# Altium PCB 35662.0.PcbDoc
Units mil, origin at the board's own origin, x right, y up, seen from the top; angles counter-clockwise.
Board outline 2775.68 x 1781.68 mil, 2 copper layers (Top Layer, Bottom Layer); 58 components, 65 nets, 383 pads, 116 vias.
Unrouted connection lines stored in the file: 120.
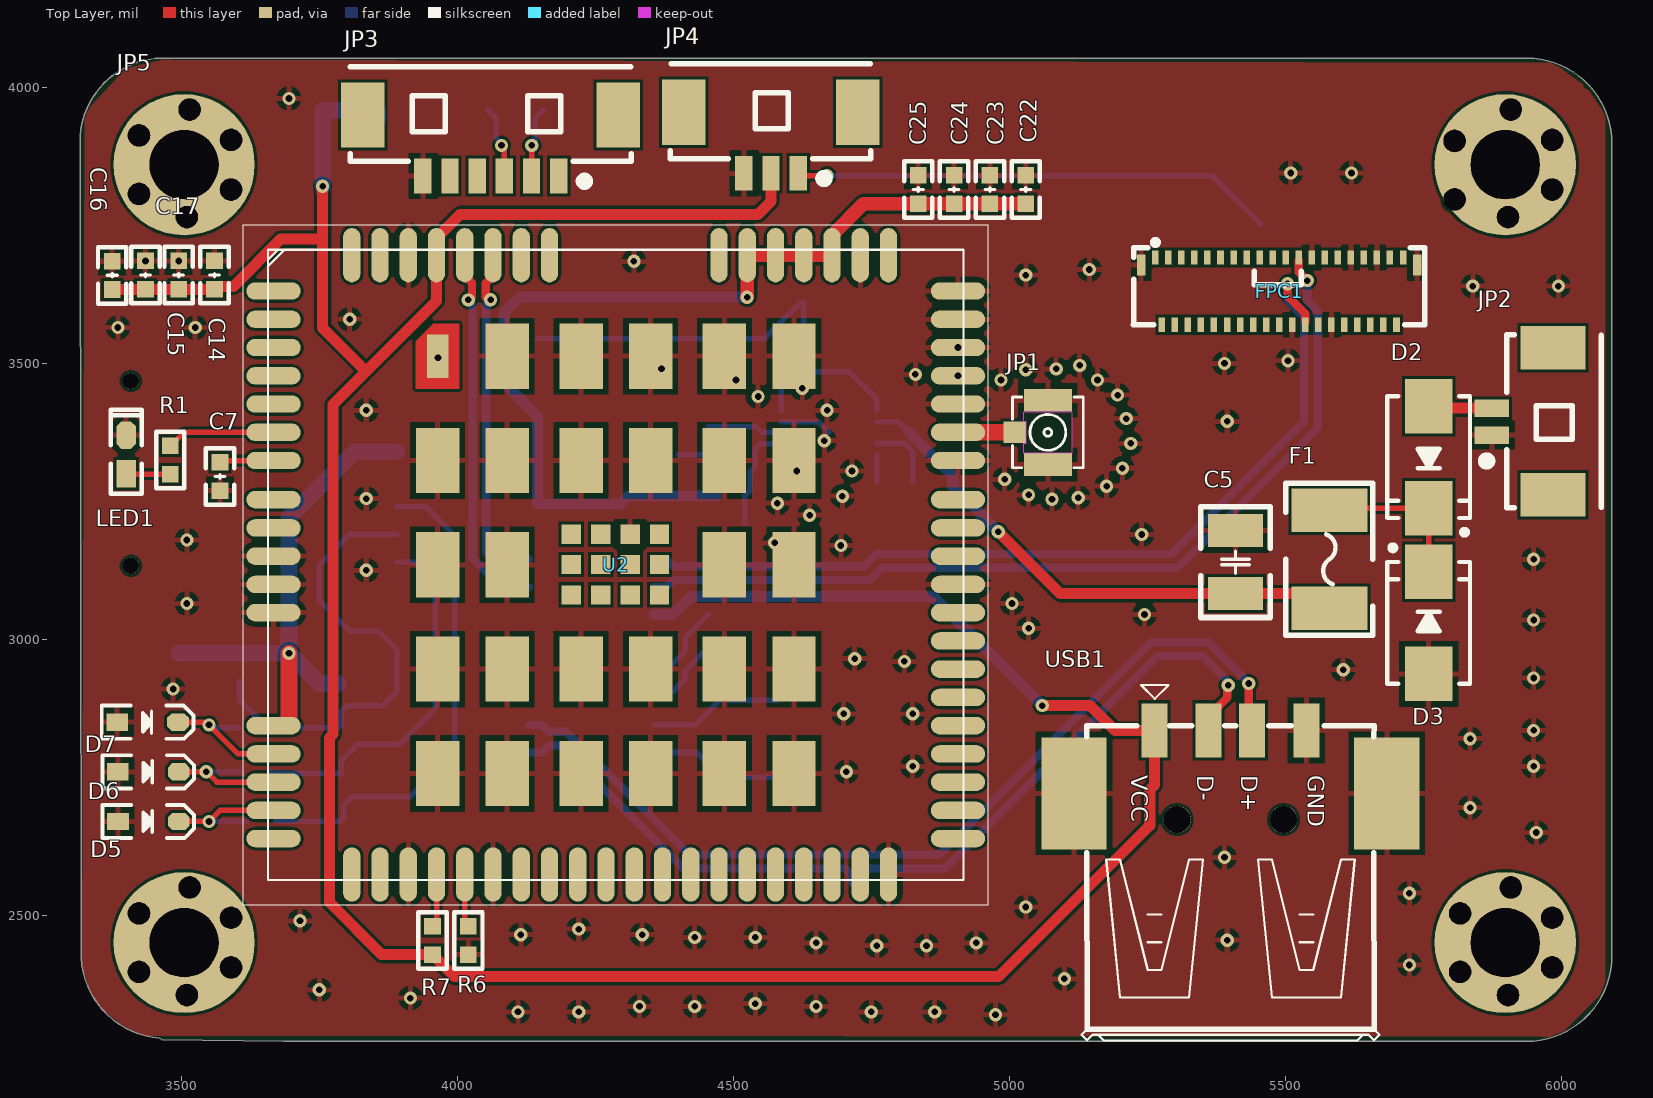
[diagram p0: Top Layer view]
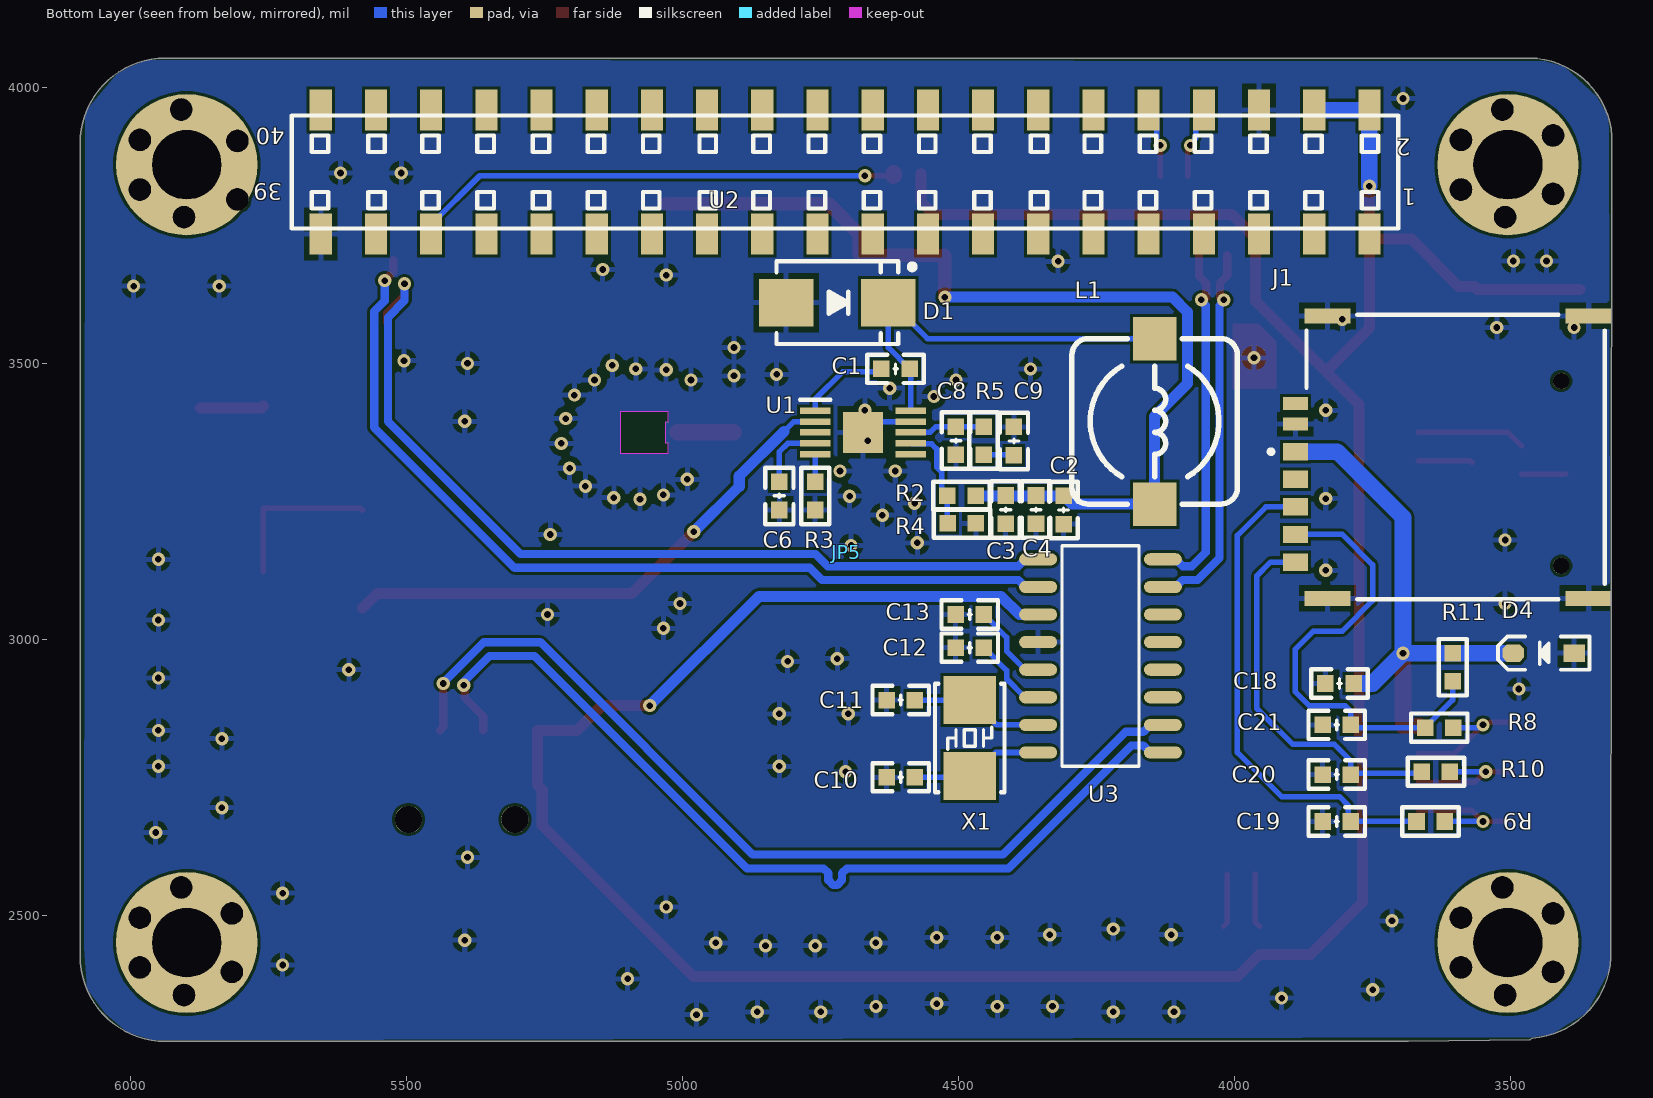
[diagram p1: Bottom Layer view, seen from below]

## Layer stack, top to bottom
Top Solder: solder mask 0.4, Solder Resist, Dk 3.5
Top Layer: signal copper 1.4
Dielectric 1: dielectric 12.6, FR-4, Dk 4.8
Bottom Layer: signal copper 1.4
Bottom Solder: solder mask 0.4, Solder Resist, Dk 3.5

## Board outline
3318.24,2422.72 ccw(c3472.99,2431.73) 3460.84,2277.19 3464.92,2274.99 3685.35,2271.6 3685.43,2271.6 5937.01,2271.6 ccw(c5937.01,2426.61) 6092.02,2426.61 6092.02,2467.25 6092.06,2467.87 6092.06,3855.36 6092.02,3855.98 6092.02,3898.27 ccw(c5937.01,3898.27) 5937.01,4053.28 3465,4053.28 3464.89,4053.28 ccw(c3468.2,3901.47) 3316.39,3898.21

## Design rules (kind name [scope] priority, off if disabled: settings)
Clearance [All] p1: gap=5 ignorepadtopadclearanceinfootprint=TRUE
DiffPairsRouting [All] p1: maxlimit=10 minlimit=10 mostfreqgap=10 toplayer_minwidth=15 toplayer_maxwidth=15 toplayer_prefwidth=15 bottomlayer_minwidth=15 bottomlayer_maxwidth=15 bottomlayer_prefwidth=15 maxuncoupledlength=500
HoleSize [All] p1: absolutevalues=TRUE maxlimit=300 minlimit=1 maxpercent=80.000 minpercent=20.000
MinimumSolderMaskSliver [All] p1: minsoldermaskwidth=0
PolygonConnect [All] p1: connectstyle=Relief reliefconductorwidth=10 reliefentries=4 polygonreliefangle="90 Angle" airgapwidth=10
RoutingVias [All] p1: holewidth=28 width=50 viastyle="Through Hole" minholewidth=28 minwidth=50 maxholewidth=28 maxwidth=50
SilkToSilkClearance [All] p1: silktosilkclearance=0
SilkToSolderMaskClearance [IsPad] p1: minsilkscreentomaskgap=0 clearancetoexposedcopper=TRUE
SolderMaskExpansion [All] p1: expansion=4 istentingtop=FALSE
SupplyNets "Schematic Supply Nets" [InNet('VBAT_IN')] p1: voltage=0.000
SupplyNets "Schematic Supply Nets_3" [InNet('VCC_EC20')] p2: voltage=0.000
SupplyNets "Schematic Supply Nets_4" [InNet('GND')] p3: voltage=0.000
SupplyNets "Schematic Supply Nets_2" [InNet('VCC_5V')] p4: voltage=0.000
Width [All] p1: maxlimit=50 minlimit=6 preferedwidth=10
25 further rules are at their usual default settings.

## Classes and differential pairs
differential pair USB3_HOST1: +USB3_HOST1_P -USB3_HOST1_N
differential pair D4: +D4_P -D4_N
differential pair D1: +D1_P -D1_N

## Components (designator, comment, footprint, x,y, rotation, side; value= is the part's Value field where it differs from the comment)
C1 "100nF" "C 0603_L" 4614.41,3490 r180 bottom
C2 "47uF" "C 0603_L" 4310,3234.41 r270 bottom
C3 "47uF" "C 0603_L" 4415,3235 r270 bottom
C4 "47uF" "C 0603_L" 4360,3235 r270 bottom
C5 "22uF X7R 25V" "C 1210_L" 5410,3140 r90 top
C6 "100nF" "C 0603_L" 4825,3260 r270 bottom
C7 "47uF" "C 0603_L" 3570,3295 r270 top
C8 "15pF" "C 0603_L" 4505,3360 r270 bottom
C9 "3.3nF" "C 0603_L" 4400,3359.41 r90 bottom
C10 "12pF" "C 0603_L" 4605,2750 r0 bottom
C11 "12pF" "C 0603_L" 4605,2890 r0 bottom
C12 "10uF" "C 0603_L" 4480,2985 r0 bottom
C13 "10uF" "C 0603_L" 4480,3045 r0 bottom
C14 "10uF" "C 0603_L" 3560,3660 r90 top
C15 "10uF" "C 0603_L" 3495,3660 r90 top
C16 "10uF" "C 0603_L" 3374.59,3659.46 r90 top
C17 "10uF" "C 0603_L" 3435,3660 r90 top
C18 "100nF" "C 0603_L" 3810,2920 r0 bottom
C19 "33pF" "C 0603_L" 3815,2670 r0 bottom
C20 "33pF" "C 0603_L" 3815,2755 r0 bottom
C21 "33pF" "C 0603_L" 3815,2845 r0 bottom
C22 "47uF" "C 0603_L" 5030,3815 r270 top
C23 "47uF" "C 0603_L" 4965,3815 r270 top
C24 "0.1uF" "C 0603_L" 4900,3815 r270 top
C25 "0.1uF" "C 0603_L" 4835,3815 r270 top
D1 "SS24" SMB 4720,3610 r180 bottom
D2 "B360B" SMB 5760,3330 r270 top
D3 "SMBJ18CA" smb 5760,3030 r90 top
D4 "GBLC05CI" SOD-323 3440,2975 r0 bottom
D5 "GBLC05CI" SOD-323 3440.12,2670 r0 top
D6 "GBLC05CI" SOD-323 3440,2760 r0 top
D7 "BLC05CI" SOD-323 3438.82,2850 r0 top
F1 "SMD1812P260TF/12 12V 2.6A" "FU 1812" 5580,3145 r90 top
FPC1 "AFE03-S39FMA-1H" FPC-SMD_P0.30-39P_FGS-XJ-H1.0 5779.05,3550.98 r180 top
J1 "SIM8066-6-1-14-01-A_REVA" "NANO SIM" 3969.84,3660.16 r270 bottom locked
JP1 "SMA WIFI 天线接口" COAXIAL/SMD/CON/V/I-PEX/W08-5801 5070,3375 r270 top
JP2 "HDR-1X2" MX1.25-WT-2P 5985,3395 r90 top
JP3 "HDR-1X6" MX1.25-WT-6P 4060,3950 r180 top
JP4 "HDR-1X3" MX1.25-WT-3P 4567.76,3955 r180 top
JP5 "Header 2X11" gudingkong 2918.7,2055 r0 top locked
L1 "10uH" CDRH73 4145,3395 r270 bottom
LED1 "蓝色" "LED 0603B" 3400.26,3335 r90 top
R1 "1K" "R 0603_L" 3480,3325 r90 top
R2 "30K" "R 0603_L" 4495,3260 r0 bottom
R3 "237K" "R 0603_L" 4760,3260 r270 bottom
R4 "10K" "R 0603_L" 4494.41,3210 r180 bottom
R5 "45.3K" "R 0603_L" 4455,3360 r270 bottom
R6 "1K" "R 0603_L" 4020,2454.41 r270 top
R7 "1K" "R 0603_L" 3955,2454.41 r270 top
R8 "51R" "R 0603_L" 3629.41,2840 r0 bottom
R9 "51R" "R 0603_L" 3635.59,2760 r0 bottom
R10 "51R" "R 0603_L" 3645,2670 r0 bottom
R11 "10K" "R 0603_L" 3605,2949.41 r90 bottom
U1 "TPS54260DGQR" SOP50P490X110-11N 4673.39,3375 r180 bottom
U2 "EC200TCNDA-N06-SNNSA" EC200U 3592.17,2510 r0 bottom locked
U3 "SL2.1A" SL2.1A 4381.3,2494.85 r90 bottom
USB1 "USB" USB-A/S_C 5400.63,2673.58 r0 top
X1 "12MHz" "OSC 5032-2P" 4480,2821.1 r90 bottom

## Footprints (in the part's own frame and the unit in brackets; to place one, negate y for a bottom-side part, rotate by r counter-clockwise, add the part's x,y. Pads: shape width x height; smd on the part's side, far side on the other; paste and mask are expansions set on the pad)
"C 0603_L" [mil] "无极性贴片电容                                       淘宝ID:黄晶宝石"
  rect 30x30 smd: 1(-25.59,0) 2(25.59,0)
  silkscreen extent -51,-26 51,26, body extent -31,-16 31,16, height 32
"C 1210_L" [mil] "无极性贴片电容                                淘宝ID:黄晶宝石"
  rect 60x100 smd: 1(-57.09,0) 2(57.09,0)
  silkscreen extent -100,-63 100,63, body extent -63,-51 63,51, height 60
CDRH73 [mm] "7.3*7.3*3.4mm（长宽高）"
  rect 2x2 smd: 1(-3.81,0) 2(3.81,0)
  silkscreen extent -3.81,-3.81 3.81,3.81, body extent -3.65,-3.65 3.65,3.65, height 3.8
COAXIAL/SMD/CON/V/I-PEX/W08-5801 [mm] "https://shop463601444.taobao.com"
  rect 1x1.05 smd: 1(0,-1.525)
  rect 1.05x2.2 smd: 2(-1.475,0) 3(1.475,0)
  Keep-Out Layer pour cut-out: -0.95,1.1 0.95,1.1 0.95,-1.1 0.5,-1.1 0.5,-1 -0.5,-1 -0.5,-1.1 -0.95,-1.1 -0.95,1.1
  silkscreen extent -1.62,-1.62 1.62,1.62
EC200U [mm] "贴片电解电容，直径6.3mm，高5.4mm"
  oval 2.5x0.8 smd far side mask+0.05: 1(1.903,-28.475) 2(1.903,-27.175) 3(1.903,-25.875) 4(1.903,-24.575) 5(1.903,-23.275) 6(1.903,-21.975) 7(1.903,-20.675) 8(1.903,-16.275) 9(1.903,-14.975) 10(1.903,-13.675) 14(1.903,-8.475) 15(1.903,-7.175) 16(1.903,-5.875) 17(1.903,-4.575) 18(1.903,-3.275) 37(33.403,-3.275) 38(33.403,-4.575) 39(33.403,-5.875) 40(33.403,-7.175) 41(33.403,-8.475) 42(33.403,-9.775) 43(33.403,-11.075) 44(33.403,-12.375) 45(33.403,-13.675) 46(33.403,-14.975) 47(33.403,-16.275) 48(33.403,-20.675) 49(33.403,-21.975) 50(33.403,-23.275) 51(33.403,-24.575) 52(33.403,-25.875) 53(33.403,-27.175) 54(33.403,-28.475) 141(1.903,-18.875) 142(1.903,-17.575) 143(33.403,-17.575) 144(33.403,-18.875)
  oval 0.8x2.5 smd far side mask+0.05: 19(8.103,-1.625) 20(9.403,-1.625) 21(10.703,-1.625) 22(12.003,-1.625) 23(13.303,-1.625) 24(14.603,-1.625) 25(15.903,-1.625) 26(17.203,-1.625) 27(18.503,-1.625) 28(19.803,-1.625) 29(21.103,-1.625) 30(22.403,-1.625) 31(23.703,-1.625) 32(25.003,-1.625) 33(26.303,-1.625) 34(27.603,-1.625) 35(28.903,-1.625) 36(30.203,-1.625) 55(30.203,-30.125) 56(28.903,-30.125) 57(27.603,-30.125) 58(26.303,-30.125) 59(25.003,-30.125) 60(23.703,-30.125) 61(22.403,-30.125) 67(14.603,-30.125) 68(13.303,-30.125) 69(12.003,-30.125) 70(10.703,-30.125) 71(9.403,-30.125) 72(8.103,-30.125) 113(6.803,-30.125) 114(5.503,-30.125) 115(6.803,-1.625) 116(5.503,-1.625)
  rect 0.889x0.889 smd far side mask+0.05: 73(19.665,-17.285) 74(19.665,-15.888) 75(19.665,-14.491) 76(18.31,-17.285) 77(18.31,-15.888) 78(18.31,-14.491) 79(16.956,-17.285) 80(16.956,-15.888) 81(16.956,-14.491) 82(15.601,-17.285) 83(15.601,-15.888) 84(15.601,-14.491)
  rect 2x3 smd far side mask+0.05: 85(25.853,-25.475) 86(25.853,-20.675) 87(25.853,-15.875) 88(25.853,-11.075) 89(25.853,-6.275) 90(22.653,-25.475) 91(22.653,-20.675) 92(22.653,-15.875) 93(22.653,-11.075) 94(22.653,-6.275) 95(19.253,-25.475) 96(19.253,-20.675) 97(19.253,-11.075) 98(19.253,-6.275) 99(16.053,-25.475) 100(16.053,-20.675) 101(16.053,-11.075) 102(16.053,-6.275) 103(12.653,-25.475) 104(12.653,-20.675) 105(12.653,-15.875) 106(12.653,-11.075) 107(12.653,-6.275) 109(9.453,-20.675) 110(9.453,-15.875) 111(9.453,-11.075) 112(9.453,-6.275)
  rect 1x2 smd far side mask+0.05: 108(9.453,-25.475)
  Bottom Layer region: 8.453,-26.175 9.253,-26.975 10.453,-26.975 10.453,-23.975 8.453,-23.975
  body extent 1.64,-30.35 33.66,-1.4, height 1
FPC-SMD_P0.30-39P_FGS-XJ-H1.0 [mm]
  rect 0.3x0.65 smd paste+0 mask+0.051: 1(13.066,-3.582) 2(12.766,-0.482) 3(12.466,-3.582) 4(12.166,-0.482) 5(11.866,-3.582) 6(11.566,-0.482) 7(11.266,-3.582) 8(10.966,-0.482) 9(10.666,-3.582) 10(10.366,-0.482) 11(10.066,-3.582) 12(9.766,-0.482) 13(9.466,-3.582) 14(9.166,-0.482) 15(8.866,-3.582) 16(8.566,-0.482) 17(8.266,-3.582) 18(7.966,-0.482) 19(7.666,-3.582) 20(7.366,-0.482) 21(7.066,-3.582) 22(6.766,-0.482) 23(6.466,-3.582) 24(6.166,-0.482) 25(5.866,-3.582) 26(5.566,-0.482) 27(5.266,-3.582) 28(4.966,-0.482) 29(4.666,-3.582) 30(4.366,-0.482) 31(4.066,-3.582) 32(3.766,-0.482) 33(3.466,-3.582) 34(3.166,-0.482) 35(2.866,-3.582) 36(2.566,-0.482) 37(2.266,-3.582) 38(1.966,-0.482) 39(1.666,-3.582)
  rect 0.4x0.95 smd paste+0 mask+0.051: 40(13.716,-3.232) 41(1.016,-3.232)
  silkscreen extent 0.67,-4.4 14.07,-0.48
"FU 1812" [mm] "贴片保险丝          淘宝ID:黄晶宝石"
  rect 2x3.5 smd: 1(-2.25,0) 2(2.25,0)
  silkscreen extent -3.5,-2 3.5,2, body extent -2.3,-1.61 2.3,1.61, height 0.87
gudingkong [mil]
  round 40 hole 40 slot 40.2 at 30 deg paste-99999 mask+4: 1(504.5,342.55) 1(504.5,1752) 1(671.3,440.55) 1(671.3,1850) 1(2888.2,1742) 1(2898.2,342.55) 1(3065,440.55) 1(3065,1850)
  round 40 hole 40 slot 40.2 at 150 deg paste-99999 mask+4: 1(504.5,448.55) 1(504.5,1858) 1(671.3,350.55) 1(671.3,1760) 1(2888.2,1848) 1(2898.2,448.55) 1(3065,350.55) 1(3065,1760)
  round 255.91 hole 125 slot 125.2 at 90 deg paste-99999 mask+4: 1(586.3,395.55) 1(586.3,1805) 1(2980,395.55) 1(2980,1805)
  round 40 hole 40 slot 40.2 at 90 deg paste-99999 mask+4: 1(591.3,300.55) 1(591.3,1710) 1(596.3,495.55) 1(596.3,1905) 1(2985,300.55) 1(2985,1710) 1(2990,495.55) 1(2990,1905)
  rect 40.16x74.8 smd far side: 1(837.16,1679.59) 2(837.16,1904) 3(937.16,1679.59) 4(937.16,1904) 5(1037.16,1679.59) 6(1037.16,1904) 7(1137.16,1679.59) 8(1137.16,1904) 9(1237.16,1679.59) 10(1237.16,1904) 11(1337.16,1679.59) 12(1337.16,1904) 13(1437.16,1679.59) 14(1437.16,1904) 15(1537.16,1679.59) 16(1537.16,1904) 17(1637.16,1679.59) 18(1637.16,1904) 19(1737.16,1679.59) 20(1737.16,1904) 21(1837.16,1679.59) 22(1837.16,1904) 23(1937.16,1679.59) 24(1937.16,1904) 25(2037.16,1679.59) 26(2037.16,1904) 27(2137.16,1679.59) 28(2137.16,1904) 29(2237.16,1679.59) 30(2237.16,1904) 31(2337.16,1679.59) 32(2337.16,1904) 33(2437.16,1679.59) 34(2437.16,1904) 35(2537.16,1679.59) 36(2537.16,1904) 37(2637.16,1679.59) 38(2637.16,1904) 39(2737.16,1679.59) 40(2737.16,1904)
  body extent 786,1666 2788,1918, height 203
"LED 0603B" [mil] "蓝色0603LED                             淘宝ID:黄晶宝石"
  rect 50x35 smd: 1(-35,0.26)
  oct 50x35 smd: 2(35,0.26)
  silkscreen extent -71,-28 81,28, body extent -31,-16 31,16, height 24
MX1.25-WT-2P [mm] "长：7.65mm，宽：4.2mm，高：3.4mm"
  rect 2x3 smd: 0(-3.382,0) 0(3.382,0)
  rect 0.8x1.6 smd: 1(-0.639,2.811) 2(0.611,2.811)
  silkscreen extent -3.98,-2.23 4,3.25, body extent -3.82,-2.1 3.83,3.09, height 3.4
MX1.25-WT-3P [mm] "长：8.9mm，宽：4.2mm，高：3.4mm"
  rect 2x3 smd: 0(-4.007,0) 0(4.007,0)
  rect 0.8x1.6 smd: 1(-1.264,2.811) 2(-0.014,2.811) 3(1.236,2.811)
  silkscreen extent -4.61,-2.23 4.62,3.25, body extent -4.45,-2.1 4.45,3.09
MX1.25-WT-6P [mm] "长：12.65mm，宽：4.2mm，高：3.4mm"
  rect 2x3 smd: 0(-5.882,0) 0(5.882,0)
  rect 0.8x1.6 smd: 1(-3.139,2.811) 2(-1.889,2.811) 3(-0.639,2.811) 4(0.611,2.811) 5(1.861,2.811) 6(3.111,2.811)
  silkscreen extent -6.48,-2.23 6.45,3.25, body extent -6.32,-2.1 6.33,3.09, height 3.4
"NANO SIM" [mm]
  rect 0.8x1.14 smd: C1(8.132,2.028) C2(10.672,2.028) C3(13.212,2.028) C6(9.402,2.028) C7(11.942,2.028)
  rect 0.6x1.14 smd: C5(6.862,2.028) CD(5.912,2.028)
  rect 0.7x2.1 smd: G1(14.882,3.508) G2(1.882,3.508) G3(14.882,15.508) G4(1.882,15.508)
  round 0.75 hole 0.75 unplated: ""(4.882,14.258) ""(13.382,14.258)
  silkscreen extent 1.84,0.81 14.93,16.26
"OSC 5032-2P" [mm] "5mm*3.2mm*0.8mm(长*宽*高)                  淘宝ID:黄晶宝石"
  rect 2.2x2.4 smd: 1(-1.75,0) 2(1.75,0)
  silkscreen extent -2.5,-1.6 2.5,1.6, body extent -2.5,-1.6 2.5,1.6, height 0.86
"R 0603_L" [mil] "1/10W贴片电阻                 淘宝ID:黄晶宝石"
  rect 30x30 smd: 1(-25.59,0) 2(25.59,0)
  silkscreen extent -51,-26 51,26, body extent -31,-16 31,16, height 16
SL2.1A [mm]
  oval 0.56x1.745 smd paste+0 mask+0.051: 1(7.624,-6.383) 2(8.894,-6.383) 3(10.164,-6.383) 4(11.434,-6.383) 5(12.704,-6.383) 6(13.974,-6.383) 7(15.244,-6.383) 8(16.514,-6.383) 9(16.514,-0.638) 10(15.244,-0.638) 11(13.974,-0.638) 12(12.704,-0.638) 13(11.434,-0.638) 14(10.164,-0.638) 15(8.894,-0.638) 16(7.624,-0.638)
  silkscreen extent 6.99,-5.28 17.15,-1.74
SMB [mm] "4.7*3.9*2.2mm(长宽高，不包括引脚）"
  rect 2.5x2.2 smd: 1(-2.35,0) 2(2.35,0)
  silkscreen extent -2.8,-1.9 3.57,1.9, body extent -2.63,-1.8 2.67,1.8, height 2.35
smb [mm] "4.7*3.9*2.2mm(长宽高，不包括引脚）"
  rect 2.5x2.2 smd: 1(-2.35,0) 2(2.35,0)
  silkscreen extent -2.8,-1.9 3.57,1.9, body extent -2.63,-1.8 2.67,1.8, height 2.35
SOD-323 [mm] "1.8x1.3X0.9mm（长宽高，不包括引脚）"
  rect 1x0.8 smd: 1(-1.4,0)
  oct 1x0.8 smd: 2(1.4,0)
  silkscreen extent -2.11,-0.76 2.11,0.76, body extent -1.34,-0.63 1.31,0.67, height 1
SOP50P490X110-11N [mm]
  rect 1.4x0.3 smd: 1(-2.2,1) 2(-2.2,0.5) 3(-2.2,0) 4(-2.2,-0.5) 5(-2.2,-1) 6(2.2,-1) 7(2.2,-0.5) 8(2.2,0) 9(2.2,0.5) 10(2.2,1)
  rect 1.83x1.89 smd: 11(0,0)
  silkscreen extent -2.9,1.5 -1.5,1.5, body extent -2.46,-1.5 2.46,1.5, height 0.96
USB-A/S_C [mm] "A型贴片母头， 淘宝ID:黄晶宝石   店铺网址:https://shop463601444.taobao.com"
  rect 1.2x2.5 smd: 1(-3.5,4.1) 2(-1,4.1) 3(1,4.1) 4(3.5,4.1)
  rect 3x5.15 smd: 4(-7.2,1.2) 4(7.2,1.2)
  round 1.25 hole 1.25 unplated: 7(-2.45,0) 8(2.45,0)
  silkscreen extent -6.85,-10.17 6.86,6.19, body extent -7.75,-9.9 7.75,4.8, height 7.4

## Part data
C1 C6 C7 C8 C9 C18 C19 C20 C21: library part "CAP NP", Part Number=CAPC0402
  C1 C6 C8 C9: ROOM=DC/DC_3V8
  C7 C18 C19 C20 C21: ROOM=Modem
C2 C3 C4 C5: library part "CAP NP", Part Number=CAPC0805
  C2 C3 C4: ROOM=DC/DC_3V8
C10 C11 C12 C13 C22 C23 C24 C25: library part C_12, "贴片电容/MLCC电容", BOM名称=无极性贴片电容, 联系下单店铺卖家 免费帮你查找封装="联系下单店铺卖家 免费技术支持"
C14 C15 C16 C17: BOM_Manufacturer="Murata Electronics", BOM_Manufacturer Part=GRM188R61E106KA73D, BOM_Supplier=LCSC, BOM_Supplier Part=C344022, Contributor=LCSC, nameAlias=Capacitance, spicePre=C, spiceSymbolName=GRM188R61E106KA73D
D1: "肖特基二极管", BOM名称=肖特基二极管, 封装库来自淘宝 ID：黄晶宝石=https://shop463601444.taobao.com, 属性=40V/2A
D2: library part SS24, "肖特基二极管", BOM名称=肖特基二极管, 封装库来自淘宝 ID：黄晶宝石=https://shop463601444.taobao.com, 属性=40V/2A
D3: library part "DIODE TS BI-DIR", "这个很容易坏", Part Number=SMAJ13CA, ROOM=VIN
D4 D5 D6 D7: library part 1N5819, "肖特基二极管", BOM名称=肖特基二极管, 属性=40V/2A, 欢迎光临=https://shop463601444.taobao.com, 淘宝ID="封装库来自淘宝 ID：黄晶宝石"
F1: library part FUSE, Part Number=SMD1812P260TF/12, ROOM=VIN
FPC1: "间距:0.3mm;触点数量:39;锁定特性:翻盖式;安装类型:卧贴;触点类型:下接;", LCSC Part Name="0.3mm P数:39 翻盖式 下接", Manufacturer=JS(钜硕电子), Add into BOM=yes, Contact Type=下接, Convert to PCB=yes, Datasheet=https://atta.szlcsc.com/upload/public/pdf/source/20180810/C262546_FD07BEB9163FBD4C911947212CF39B0D.pdf, Device=AFE03-S39FMA-1H, FFC, FCB Thickness=0.2mm, Height Above Board=1mm, Locking Feature=翻盖式, Manufacturer Part=AFE03-S39FMA-1H, Mounting Type=卧贴, Name=AFE03-S39FMA-1H, Number of Contacts=39, Pitch=0.3mm, Supplier=LCSC, Supplier Footprint=SMD,P=0.3mm, Supplier Part=C262546, Symbol=AFE03-S39FMA-1H
J1: "Nano SIM Card ConnectorPush-Push Type, SMT, 6Pin, 1.44mm Profile", Package=None, Availability=Unavailable, Check_prices=https://www.snapeda.com/parts/SIM8066-6-1-14-01-A/Global%20Connector%20Technology/view-part/5720957/?ref=eda, MF="Global Connector Technology", MP=SIM8066-6-1-14-01-A, Price=None, SnapEDA_Link=https://www.snapeda.com/parts/SIM8066-6-1-14-01-A/Global%20Connector%20Technology/view-part/5720957/?ref=snap
JP1: library part SMA, "SMA-2.4G射频天线接口", BOM名称=SMA-2.4G射频天线接口, 联系卖家，免费技术支持=唯一出售店铺网址https://shop463601444.taobao.com
JP2: library part "Header 2", "2P接插件", BOM名称=2P接插件, 版权归属="封装库来自淘宝 ID：黄晶宝石", 联系售后=https://shop463601444.taobao.com
JP3: library part "Header 6", "6P连接器", BOM名称=6P连接器, 联系卖家 免费技术支持=封装库来自淘宝卖家ID：黄晶宝石
JP4: library part "Header 3", "3P接插件", BOM名称=3P接插件, 学习资源=https://shop463601444.taobao.com, 版权归属="封装库来自淘宝 ID：黄晶宝石"
JP5: library part "Header 20X2", "20*2P接插件", BOM名称=20*2P接插件, 封装库来自淘宝卖家ID：黄晶宝石=其他店铺购入均为盗版封装库，请立即申请退款，本店现金奖励50~200元, 联系卖家，免费查找封装=唯一出售店铺网址https://shop463601444.taobao.com
L1: library part "INDUCTOR IRON", Part Number=MHCC10040-100M-R7, ROOM=DC/DC_3V8
LED1: library part LED, "贴片LED", BOM名称=贴片LED, 封装库来自淘宝卖家：黄晶宝石=其他店铺购入均为盗版封装库，无更新权益，退款现金奖励200~1000元
R1 R6 R7: library part R, "贴片电阻", BOM名称=贴片电阻, 当前库版本V2022.10.7 @黄晶宝石=最新版本发布https://shop463601444.taobao.com
R2 R3 R4 R5 R8 R9 R10 R11: library part R, Part Number=RESC0402
  R2 R3 R4 R5: ROOM=DC/DC_3V8
  R8 R9 R10 R11: ROOM=Modem
U1: library part TPS54260, Part Number=TPS54260, ROOM=DC/DC_3V8
U2: library part EC20CEFILG-128-SGNS, "Quectel EC25 is a series of LTE Cat 4 module optimized specially for M2M and IoT applications.", Package=None, Availability=Unavailable, MF=Quectel, MP=EC25-AU, OriginalSymbolOrigin=(-90000,250000), Part Number=EC20CEFILG-128-SGNS, Price=None, ROOM=Modem
U3: BOM_Manufacturer=CoreChips, BOM_Manufacturer Part=SL2.1A, BOM_Supplier=LCSC, BOM_Supplier Part=C192893, Contributor=LCSC, spicePre=U
USB1: library part USB-A/S, "USB-A型母接口", BOM名称=USB-A型母接口, 学习资源=https://shop463601444.taobao.com, 版权归属="封装库来自淘宝 ID：黄晶宝石"
X1: library part XTAL-2P, "2脚无源脚晶振", BOM名称=2脚无源脚晶振, 学习资源=www.ooocke.com, 版权归属=源创客

## Via types
v1: diameter 24, hole 12, Top Layer to Bottom Layer, 116 vias

## Nets (pads, with @x,y where several pads share a name; then routed paths per layer and width w, separated by ;. In a path a pad name is that pad's centre, name@x,y a point inside that pad or via, vN(x,y) a via of type N, cw(c..) or ccw(c..) an arc to the next point about the centre after c; other vN are vias at no path point)
12VIN: D2.1 JP2.2 | length 115.8
  Top Layer w20: D2.1 5763.46,3419.06 JP2.2
D1_N: U2.70 U3.7 | length 676.5
  Top Layer w15: U2.70 4013.54,3658.61 4026.63,3645.52 4026.63,3622.74 v1@4026.63,3620
  Bottom Layer w15: v1(4020,3615) 4020,3612.56 4027.65,3604.92 4027.65,3147 4067.14,3107.5 4094.36,3107.5 4106.86,3095 U3.7
D1_P: U2.69 U3.8 | length 635.3
  Top Layer w15: v1@4051.63,3620 4051.63,3633.1 4051.63,3645.52 4064.72,3658.61 U2.69
  Bottom Layer w15: v1(4060.3,3615.18) 4060.3,3612.74 4052.65,3605.09 4052.65,3157.35 4077.5,3132.5 4094.36,3132.5 4106.86,3145 U3.8
D4_N: U3.1 USB1.2 | length 1685.4
  Top Layer w15: USB1.2 5361.26,2860.59 5395.18,2894.51 5395.18,2915.01 v1(5396.9,2916.74)
  Bottom Layer w15: U3.1 4153.14,2795 4165.64,2807.5 4187.14,2807.5 4409.64,2585 4670,2585 4702.5,2585 4711.29,2576.21 4711.29,2563.75 4720.04,2555 4727.54,2555 4736.29,2563.75 4736.29,2576.21 4745.07,2585 4790,2585 4883.6,2585 5268.49,2969.89 5350.11,2969.89 5365.56,2954.44 5395.18,2924.82 5395.18,2918.46 v1(5396.9,2916.74)
D4_P: U3.2 USB1.3 | length 1678.7
  Top Layer w15: v1(5434,2920) 5434,2841 USB1.3
  Bottom Layer w15: U3.2 4153.14,2845 4165.64,2832.5 4197.5,2832.5 4420,2610 4790,2610 4873.25,2610 5258.14,2994.89 5360.47,2994.89 5390.56,2964.79 v1@5434,2921.36
GND: C2.2 C3.2 C4.2 C5.2 C6.2 C7.2 C8.2 C9.2 C10.2 C11.2 C12.2 C13.2 C14.2 C15.2 C16.2 C17.2 C18.2 C19.2 C20.2 C21.2 C22.1 C23.1 C24.1 C25.1 D1.1 D3.1 D4.1 D5.1 D6.1 D7.1 FPC1.22 FPC1.25 FPC1.28 FPC1.31 FPC1.35 FPC1.40 FPC1.41 J1.C5 J1.G1 J1.G2 J1.G3 J1.G4 JP1.2 JP1.3 JP2.1 JP3.6 JP4.3 JP5.6 JP5.39 LED1.2 R3.2 R4.2 R6.2 U1.9 U1.11 U2.8 U2.9 U2.10 U2.19 U2.22 U2.36 U2.46 U2.48 U2.50 U2.51 U2.52 U2.53 U2.54 U2.56 U2.72 U2.76 U2.85 U2.86 U2.87 U2.88 U2.89 U2.90 U2.91 U2.92 U2.93 U2.94 U2.95 U2.96 U2.97 U2.98 U2.99 U2.100 U2.101 U2.102 U2.103 U2.104 U2.105 U2.106 U2.107 U2.108 U2.109 U2.110 U2.111 U2.112 U3.12 USB1.4 | length 94.8
  Bottom Layer w10: U1.9 4653.7,3394.69 U1.11
  other v1: 4975,2320 4110,2325 4220,2325 4750,2325 4865,2325 4330,2335 4430,2335 4650,2335 4540,2340 3915,2350 3750,2365 5100,2385 5725,2410 4760,2445 4850,2445 4650,2450 4940,2450 5395,2455 4430,2460 4540,2460 4115,2465 4335,2465 4220,2475 3715,2490 5030,2515 5725,2540 5390,2605 5955,2650 5835,2695 4705,2760 4825,2770 5950,2770 5835,2820 5950,2835 4700,2865 4825,2865 3485,2910 5950,2930 5605,2945 4810,2960 4720,2965 5035,3020 5950,3035 5245,3045 3510,3065 5005,3065 3835,3125 5950,3145 4695,3170 4575,3175 3510,3180 5240,3190 4638.26,3225 4580,3246.74 5077.54,3253.65 3835,3255 5125,3256.74 4697.77,3259.39 5035,3261.74 5176.35,3277.46 4991.74,3290 4615,3305 4715,3305 5205,3310 5220,3355 4665,3360 5395,3395 5211.88,3400 3835,3415 4670,3415 4545,3440 5196.35,3442.54 4625,3455 4505,3470 4985,3470 5160,3470 4907.24,3477.52 4830,3480 5030,3488.26 4370,3490 5085,3490 5127.54,3496.35 5390,3500 5505,3505 3965,3510 4907.24,3528.7 3385,3565 3525,3565 3805,3580 5840,3640 5995,3640 5030,3660 5145,3670 4320,3685 3435,3685.59 3495,3685.59 5510,3845 5620,3845 3695,3980
GPI04_A1_d: FPC1.8
GPIO0_A5: FPC1.38
GPIO0_C5: FPC1.39
GPIO4_A0_d: FPC1.7
GPIO4_A6_d: FPC1.13
GPIO4_A7_d: FPC1.14
GPIO4_B0_d: FPC1.15
GPIO4_B1_d: FPC1.16
GPIO4_B6_d: FPC1.17
GPIO4_B7_d: FPC1.18
GPIO4_C0_d: FPC1.19
HP_SNS: FPC1.33
HPL_OUT: FPC1.32
HPR_OUT: FPC1.34
LED_NET_STATUS: R1.2 U2.6 | length 197.3
  Top Layer w10: R1.2 3504.57,3375.16 U2.6
NetC1_1: C1.1 U1.1 | length 163.4
  Bottom Layer w10: C1.1 4645,3485 4710,3485 4760,3435 U1.1
NetC1_2: C1.2 D1.2 L1.1 U1.10 | length 721.9
  Bottom Layer w10: L1.1 4556.57,3545 4621.57,3610 D1.2 4627.48,3528.66 C1.2 4586.77,3487.95 U1.10
NetC6_1: C6.1 U1.4 | length 125.8
  Bottom Layer w10: U1.4 4809.68,3355.32 4825,3340 C6.1
NetC7_1: C7.1 U2.7 | length 98.5
  Top Layer w10: C7.1 3573.38,3323.98 U2.7
NetC8_1: C8.1 R5.1 U1.8 | length 136.2
  Bottom Layer w10: R5.1 C8.1 4541.19,3385.59 4551.78,3375 U1.8
NetC9_1: C9.1 R5.2 | length 54.4
  Bottom Layer w10: C9.1@4400.59,3334.41 R5.2
NetC10_1: C10.1 U3.16 X1.1 | length 241.9
  Bottom Layer w10: U3.16 4433.27,2795 4476.06,2752.2 X1.1 4482.2,2750 C10.1
NetC11_1: C11.1 U3.15 X1.2 | length 241.9
  Bottom Layer w10: U3.15 4431.06,2845 4476.06,2890 X1.2 C11.1
NetC12_1: C12.1 U3.14 | length 144.4
  Bottom Layer w10: U3.14 4379.51,2895 4413.11,2928.6 4413.11,2943.71 C12.1
NetC13_1: C13.1 U3.13 | length 154.4
  Bottom Layer w10: U3.13 4379.51,2945 4413.11,2978.6 4413.11,3003.71 C13.1
NetC19_1: C19.1 J1.C2 R10.2 | length 910.2
  Bottom Layer w10: R10.2 C19.1 3794.41,2675 3794.41,2699.41 3810,2715 3915,2715 3995,2795 3995,3188.28 3943.28,3240 J1.C2
NetC20_1: C20.1 J1.C3 R9.2 | length 685.2
  Bottom Layer w10: R9.2 3663.68,2757.5 3786.91,2757.5 C20.1 3789.41,2779.41 3820,2810 3895,2810 3960,2875 3960,3115 3935,3140 J1.C3
NetC21_1: C21.1 J1.C7 R8.2 R11.1 | length 862.2
  Bottom Layer w10: R11.1 3605,2890 R8.2 3784.4,2840 C21.1 3789.41,2869.41 3800,2880 3865,2880 3890,2905 3890,2982.43 3857.43,3015 3805,3015 3750,3070 3750,3135 3805,3190 J1.C7
NetD2_2: D2.2 D3.2 F1.2 | length 296.6
  Top Layer w10: F1.2 5583.9,3237.48 D2.2 D3.2
NetJP1_1: JP1.1 U2.49 | length 102.8
  Top Layer w30: U2.49 4907.32,3375.08 5009.88,3375.08 JP1.1
NetLED1_1: LED1.1 R1.1 | length 80.3
  Top Layer w10: LED1.1 3400.59,3299.41 R1.1
NetR2_2: R2.2 R4.1 U1.7 | length 194.3
  Bottom Layer w10: R4.1 4520.59,3210.59 R2.2 4530.59,3270 4530.59,3302.8 4540,3312.21 4540,3345 4549.09,3354.09 4585.55,3354.09 U1.7
NetR3_1: R3.1 U1.5 | length 49
  Bottom Layer w10: U1.5@4759.55,3334.39 4760,3333.94 R3.1
NetR6_1: R6.1 U2.21 | length 96.7
  Top Layer w10: U2.21 4013.54,2486.46 R6.1
NetR7_1: R7.1 U2.20 | length 97
  Top Layer w10: R7.1 3962.36,2487.36 U2.20
PIX_RX: JP3.3 JP5.8 | length 131.8
  Top Layer w10: v1(4080,3895) 4080,3891.21 4085.15,3886.06 JP3.3
  Bottom Layer w10: JP5.8 4070.94,3943.92 4070.94,3907.85 4080,3898.79 v1(4080,3895)
PIX_TX: JP3.2 JP5.10 | length 128.6
  Top Layer w10: JP3.2 4135,3839.98 v1(4135,3895)
  Bottom Layer w10: v1(4135,3895) 4135,3898.79 4140.78,3904.57 4140.78,3943.92 JP5.10
PWM_OUT: JP4.1 JP5.35 | length 878.7
  Top Layer w10: JP4.1@4618.26,3840 v1(4670,3840)
  Top Layer w30: JP4.1 4617.51,3840.75 JP4.1@4618.26,3840
  Bottom Layer w10: v1(4670,3840) 5367.78,3840 JP5.35@5455.86,3751.91
UART0_RX: FPC1.36
UART0_TX: FPC1.37
UART1_RX: FPC1.6
UART1_TX: FPC1.5
UART7_RX: FPC1.10
UART7_TX: FPC1.9
UART9_RX: FPC1.12
UART9_TX: FPC1.11
USB3_HOST1_N: FPC1.24 U3.9 | length 1635.8
  Top Layer w15: v1(5504.18,3644.1) 5504.18,3621.91 5536.09,3590 FPC1.24@5536.09,3575.26
  Bottom Layer w15: U3.9 4379.32,3145 4391.82,3132.5 4737.5,3132.5 4759.5,3154.5 5294.14,3154.5 5534.21,3394.56 5534.21,3583.49 5504.18,3613.52 v1(5504.18,3644.1)
USB3_HOST1_P: FPC1.23 U3.10 | length 1639.6
  Top Layer w15: FPC1.23@5524.7,3686.7 5524.7,3665.3 v1(5540,3650)
  Bottom Layer w15: U3.10 4379.32,3095 4391.82,3107.5 4747.85,3107.5 4769.85,3129.5 5304.5,3129.5 5559.21,3384.21 5559.21,3593.85 5540,3613.05 v1(5540,3650)
USB3_HOST1_SSRXN/SATA1_RXN: FPC1.30
USB3_HOST1_SSRXP/SATA1_RXP: FPC1.29
USB3_HOST1_SSTXN/SATA1_TXN: FPC1.27
USB3_HOST1_SSTXP/SATA1_TXP: FPC1.26
USIM_CLK: D6.2 R9.1 U2.16 | length 244.7
  Top Layer w10: D6.2 v1(3545,2760) 3545.78,2760 3564.48,2741.3 U2.16
  Bottom Layer w10: v1(3545,2760) R9.1
USIM_DATA: D5.2 R10.1 U2.17 | length 249.6
  Top Layer w10: D5.2 v1(3550,2670) 3570.12,2690.12 U2.17
  Bottom Layer w10: v1(3550,2670) R10.1
USIM_RST: D7.2 R8.1 U2.15 | length 252.9
  Top Layer w10: D7.2 3541.21,2850 3546.21,2845 v1(3550,2845) 3602.52,2792.48 U2.15
  Bottom Layer w10: v1(3550,2845) 3553.79,2845 3558.79,2840 R8.1
USIM_VDD: C18.1 D4.2 J1.C1 R11.2 U2.14 | length 961.3
  Top Layer w30: U2.14 3694.31,2843.66 3695,2844.35 v1(3695,2975)
  Bottom Layer w30: D4.2 R11.2 v1(3695,2975) ; C18.1 3750,2920 v1(3695,2975) ; J1.C1 3813.81,3340 3695,3221.19 v1(3695,2975)
VBAT_IN: C5.1 F1.1 U1.2 | length 970.8
  Top Layer w20: v1(4980,3195) 5092.09,3082.91 C5.1 5553.51,3082.91 F1.1
  Bottom Layer w10: U1.2 4798.6,3394.69 4816.64,3376.64
  Bottom Layer w20: 4816.64,3376.64 4897.64,3295.64 4897.64,3277.36 v1(4980,3195)
VCC_5V: C14.1 C15.1 C16.1 C17.1 JP4.2 JP5.2 JP5.4 R7.2 U2.71 U3.11 USB1.1 | length 5874.5
  Top Layer w20: C16.1 3374.86,3634.14 C14.1@3559.73,3634.14 ; C14.1 3565,3639.41 3594.41,3639.41 3680,3725 3755.86,3725 ; v1@3755.1,3810.1 3755.1,3820.1 v1(3755.86,3820.86) 3755.86,3725 ; JP4.2 4568.3,3793.3 4545,3770 4005,3770 3962.36,3727.36 U2.71 3962.08,3695.74 3962.08,3612.98 3834.55,3485.45 ; v1(5060,2880) 5146.71,2880 5191.71,2835 USB1.1 5262.84,2735.75 5254.57,2727.48 5254.57,2662.44 4980.95,2388.82 3994.64,2388.82 3974.82,2408.64 3974.82,2409 R7.2 3862.89,2428.82 3768.07,2523.63 3768.07,2821.5 3775,2828.43 3775,3425.91 3834.55,3485.45 ; 3755.86,3725 3755.86,3564.14 3834.55,3485.45
  Bottom Layer w20: U3.11 4390,3045 4423,3078 4862,3078 v1(5060,2880)
  Bottom Layer w30: v1(3755.86,3820.86) JP5.2 JP5.4 JP5.4@3855.86,3941.68
VCC_EC20: C2.1 C3.1 C4.1 C22.2 C23.2 C24.2 C25.2 L1.2 R2.1 U2.57 U2.58 U2.59 U2.60 | length 1794.4
  Top Layer w25: v1(4525,3620) 4525.35,3620.35 U2.60 U2.59 U2.58 U2.57 4680.14,3697.27 4680.14,3733.64 4735.91,3789.41 C25.2 C24.2 C23.2 C22.2
  Bottom Layer w20: R2.1 C2.1 4295,3245 L1.2 4145,3403.83 4085.63,3463.2 4085.63,3592.65 4112.98,3620 v1(4525,3620)
pads on no net: FPC1.1 FPC1.2 FPC1.3 FPC1.4 FPC1.20 FPC1.21 J1. J1.C6 J1.CD JP2.0 JP3.0 JP3.1 JP3.4 JP3.5 JP4.0 JP5.1 JP5.3 JP5.5 JP5.7 JP5.9 JP5.11 JP5.12 JP5.13 JP5.14 JP5.15 JP5.16 JP5.17 JP5.18 JP5.19 JP5.20 JP5.21 JP5.22 JP5.23 JP5.24 JP5.25 JP5.26 JP5.27 JP5.28 JP5.29 JP5.30 JP5.31 JP5.32 JP5.33 JP5.34 JP5.36 JP5.37 JP5.38 JP5.40 U1.3 U1.6 U2.1 U2.2 U2.3 U2.4 U2.5 U2.18 U2.23 U2.24 U2.25 U2.26 U2.27 U2.28 U2.29 U2.30 U2.31 U2.32 U2.33 U2.34 U2.35 U2.37 U2.38 U2.39 U2.40 U2.41 U2.42 U2.43 U2.44 U2.45 U2.47 U2.55 U2.61 U2.67 U2.68 U2.73 U2.74 U2.75 U2.77 U2.78 U2.79 U2.80 U2.81 U2.82 U2.83 U2.84 U2.113 U2.114 U2.115 U2.116 U2.141 U2.142 U2.143 U2.144 U3.3 U3.4 U3.5 U3.6 USB1.7 USB1.8

## Polygon pours and split planes (outlines as drawn)
GND on Top Layer "GND_L01_P000" (solid, remove dead copper, pour order 0): 3480,4050 3465,4050 3400,4035 3335,3965 3325,3945 3320,2415 3320.99,2404.78 3331.14,2370.13 3331.77,2367.81 3334.04,2364.1 3351.4,2335.71 3361.08,2325.68 3364.64,2322.47 3398.42,2297.57 3418.18,2288.11 3436.15,2282.15 5965,2280 5980,2280 6005,2290 6070,2355 6080,2380 6080,2395 6080,3945 6076.27,3955 6070,3965 6050,3995 6040,4000 6040,4005 6005,4030 6000,4035 5980,4045 5945,4045
GND on Bottom Layer "GND_L02_P001" (solid, remove dead copper, pour order 1): 3452.34,4047.02 3437.34,4047.02 3424.62,4043.75 3402.55,4037.02 3343.66,3983.21 3324.96,3949.49 3322.34,3927.02 3319.12,2432.84 3320.45,2407 3321.68,2401.36 3321.84,2398.43 3363.09,2322.41 3400.07,2300.93 3424.62,2284.46 3460.84,2279.07 5959.18,2273.19 6006.22,2287.91 6045.92,2322.41 6078.66,2366.84 6084.75,2441.61 6082.4,3952.03 6077.22,3962.43 6025,4025 6005.15,4035.52 5970,4050

## Silkscreen, mask and mechanical layers (free items; w line width, h text height)
Mechanical 1:
  lines w10: 3321.4,2426.61 3321.4,3898.27 cw(c3468.2,3901.47) 3465,4048.27 5937.01,4048.27 cw(c5937.01,3898.27) 6087.01,3898.27 6087.01,3855.36 ; 3322.99,2431.73 ccw(c3472.99,2431.73) 3472.99,2281.73 ; 3465,2280 3685.43,2276.61 5732.68,2276.61 5936.71,2276.61 ; 5937.01,2276.61 ccw(c5937.01,2426.61) 6087.01,2426.61 6087.01,2469.53 ; 6087.05,2467.87 6087.05,3855.36

## Text inside footprints (layer, text, board x,y; h text height)
JP5: Bottom Overlay "2" at 3680.86,3906.79 h30 r180; Bottom Overlay "1" at 3670.86,3816.79 h30 r180; Bottom Overlay "39" at 5725.86,3826.79 h30 r180; Bottom Overlay "40" at 5720.86,3926.79 h30 r180
USB1: Top Overlay "VCC" at 5220.63,2753.58 h30 r270; Top Overlay "D-" at 5340.63,2753.58 h30 r270; Top Overlay "D+" at 5420.63,2753.58 h30 r270; Top Overlay "GND" at 5540.63,2753.58 h30 r270